# Altium PCB 智能家居-开关-电力板.PcbDoc
Units mm, origin at the board's own origin, x right, y up, seen from the top; angles counter-clockwise.
Board outline 65 x 65 mm, 2 copper layers (Top Layer, Bottom Layer); 16 components, 10 nets, 46 pads, 0 vias.
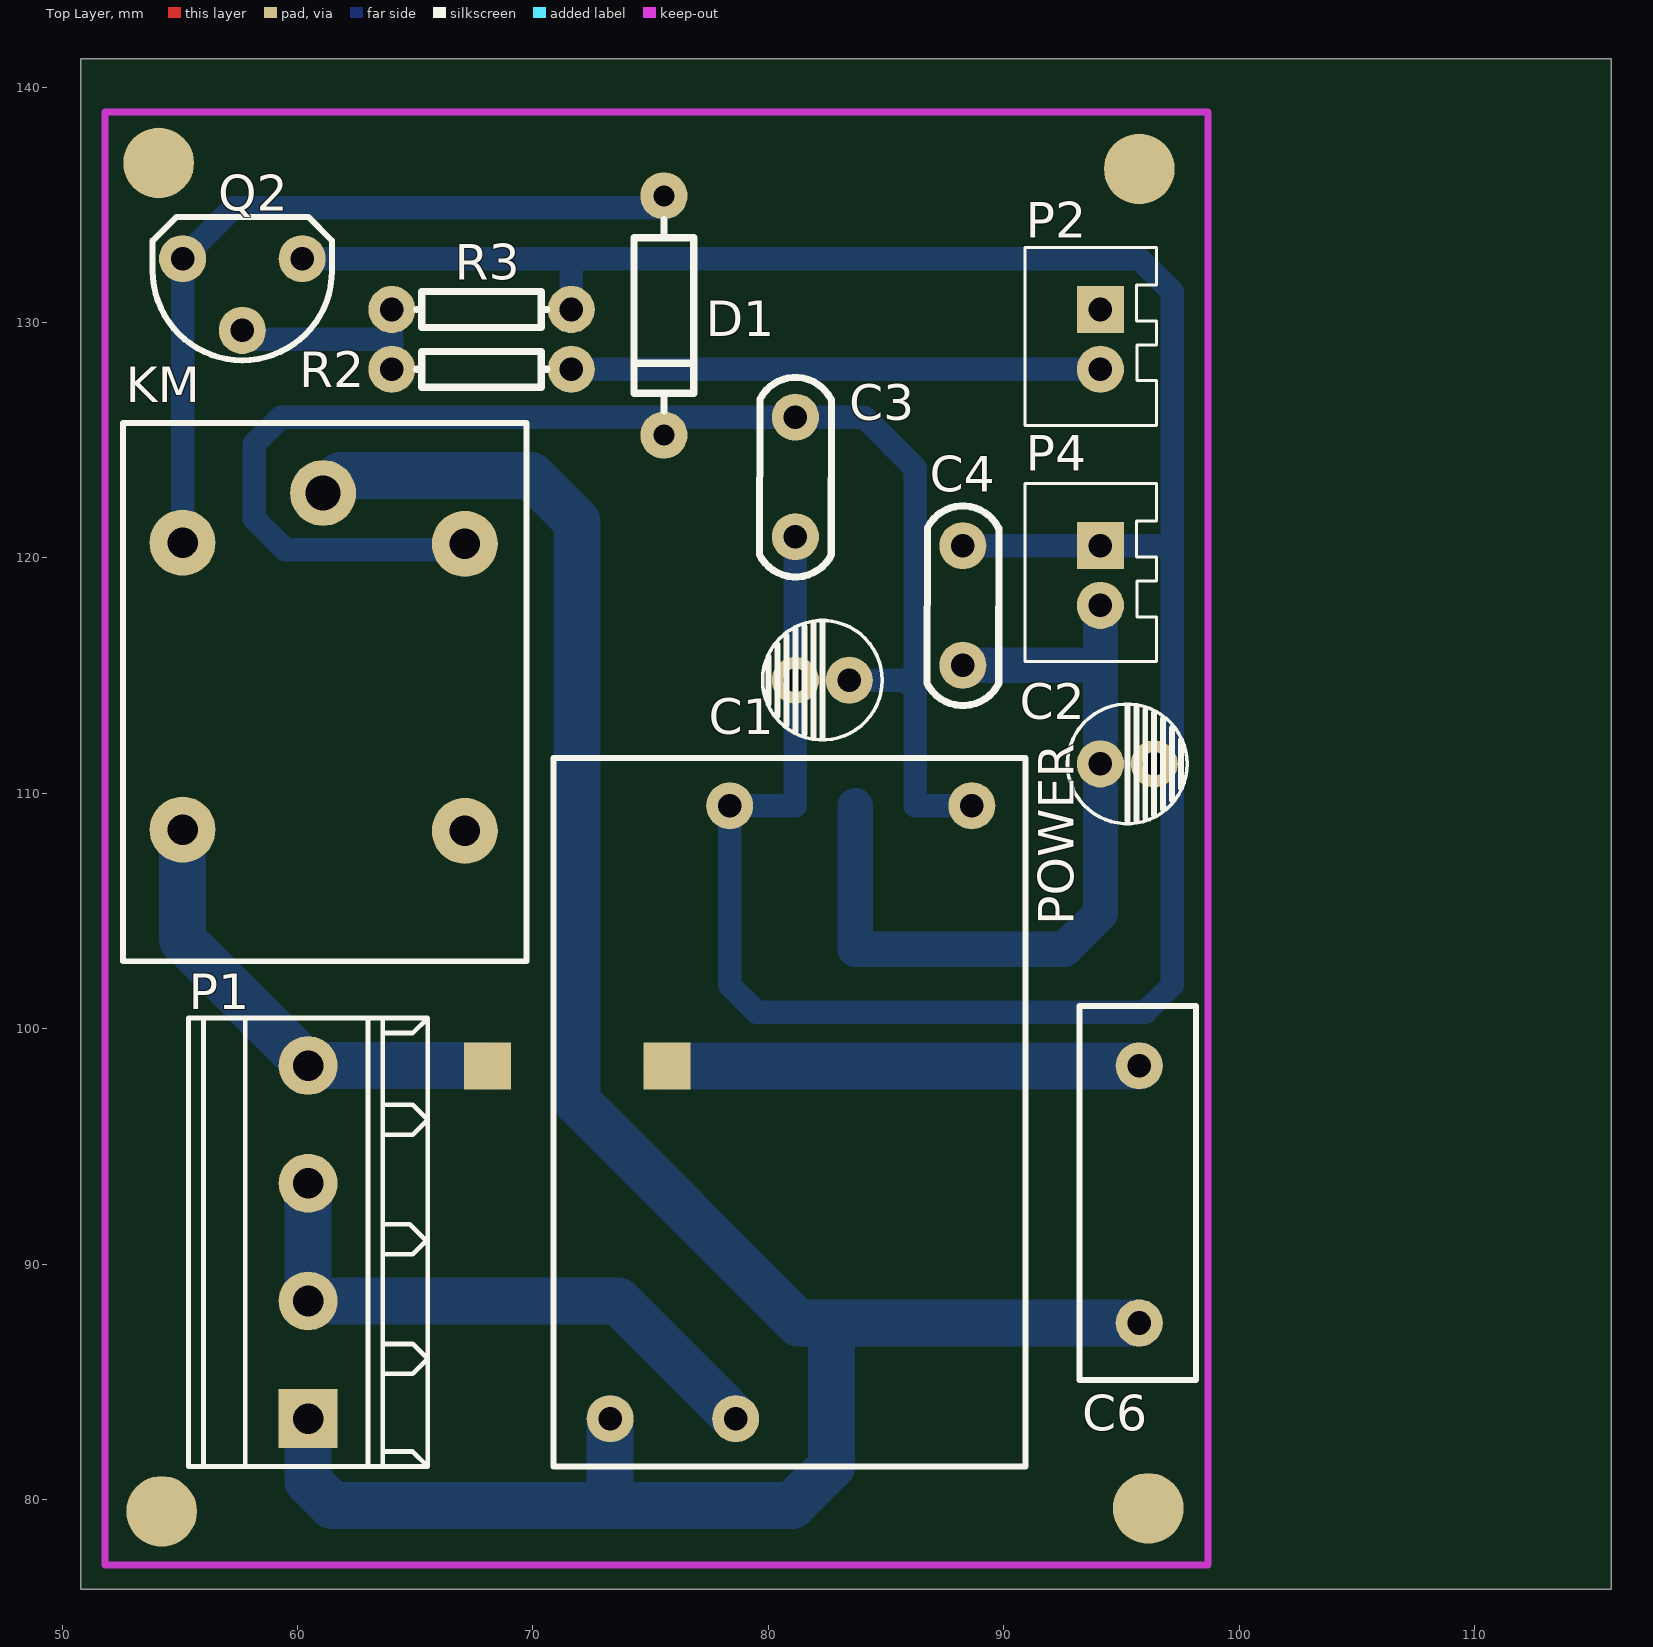
[diagram p0: Top Layer view]
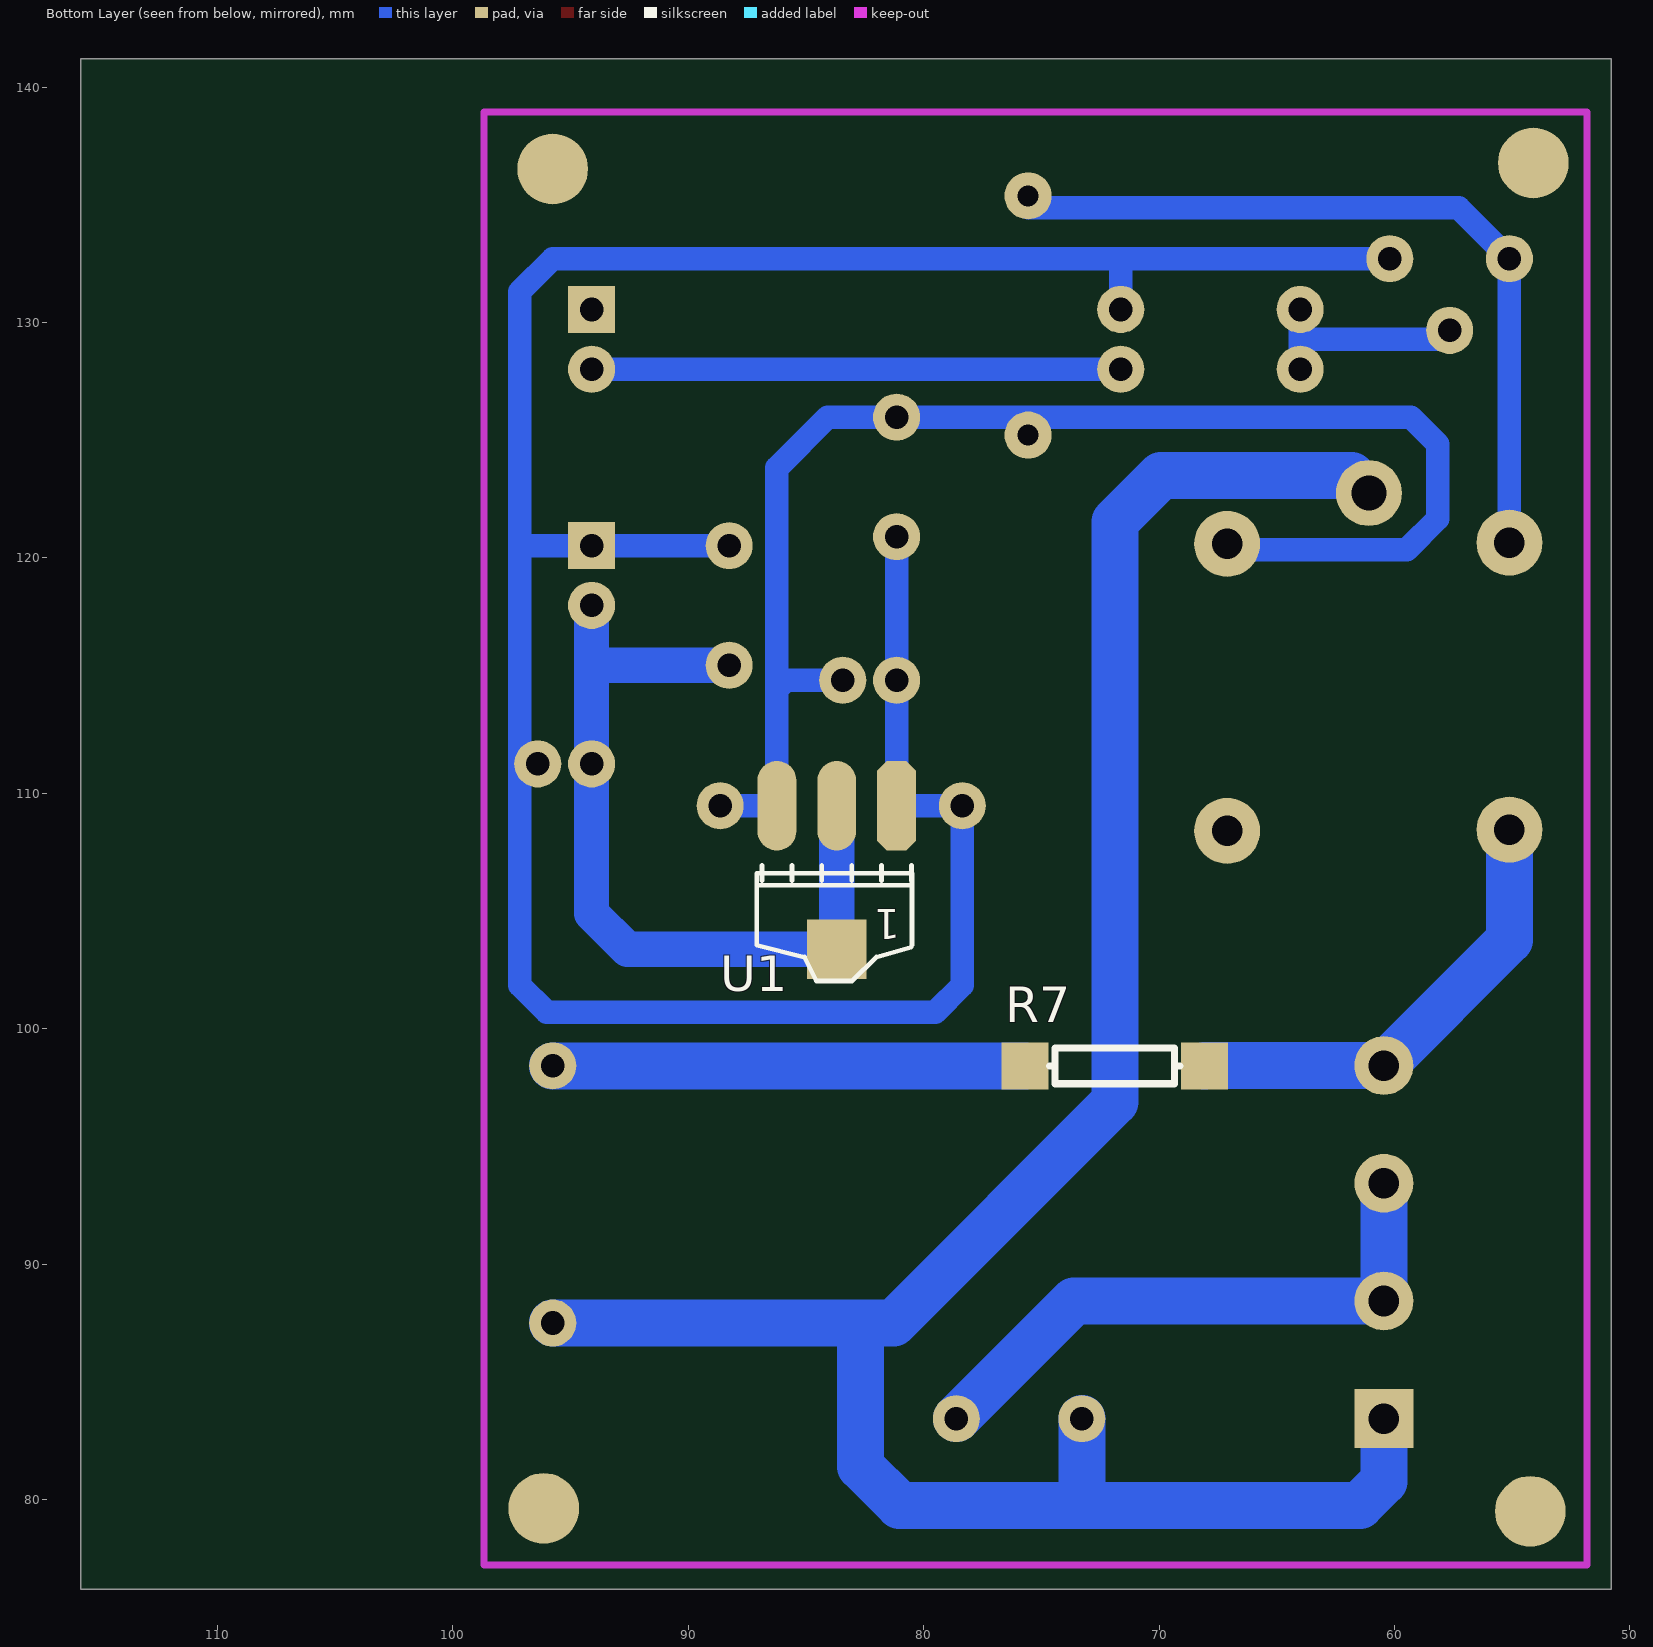
[diagram p1: Bottom Layer view, seen from below]

## Layer stack, top to bottom
Top Solder: solder mask 0.0102, Solder Resist, Dk 3.5
Top Layer: signal copper 0.0356
Dielectric 1: dielectric 0.32, FR-4, Dk 4.8
Bottom Layer: signal copper 0.0356
Bottom Solder: solder mask 0.0102, Solder Resist, Dk 3.5

## Board outline
50.8,76.2 115.8,76.2 115.8,141.2 50.8,141.2

## Design rules (kind name [scope] priority, off if disabled: settings)
Clearance [All] p1: gap=0.5
PolygonConnect [All] p1: connectstyle=Relief reliefconductorwidth=0.254 reliefentries=4 polygonreliefangle="90 Angle" airgapwidth=0.254
RoutingVias [All] p1: holewidth=1 width=2 viastyle="Through Hole" minholewidth=0.711 minwidth=1.27 maxholewidth=0.711 maxwidth=1.27
SolderMaskExpansion [All] p1: expansion=0.102
Width [All] p1: maxlimit=5 minlimit=0.5 preferedwidth=0.5 minimp=50.000000 maximp=50.000000 favimp=50.000000
30 further rules are at their usual default settings.

## Components (designator, comment, footprint, x,y, rotation, side; value= is the part's Value field where it differs from the comment)
C1 "Cap Pol1" CD5 83.439,114.808 r270 top
C2 "Cap Pol1" CD5 94.107,111.252 r90 top
C3 "0.01uF" 0.1UF 81.153,123.444 r270 top
C4 "0.01uF" 0.1UF 88.265,117.983 r270 top
C6 "Cap" 0.1UF/275V 95.758,98.425 r270 top
D1 "Diode" DIODE 75.565,135.382 r270 top
KM "12VDC" SRD_RELAY 61.112,115.583 r270 top
P1 "电源端口" JK128-500-4P 60.452,83.439 r180 top
P2 "双向可控硅控制端口" TJC3-2A 94.107,130.556 r270 top
P4 "控制板电源端口" TJC3-2A 94.107,120.523 r270 top
POWER "220/5开关电源" 220/5开关电源 73.279,83.439 r90 top
Q2 "8050" TO-92D 57.658,132.715 r180 top
R2 "4.7K" AXIAL0.3#1 67.818,128.016 r180 top
R3 "4.7K" AXIAL0.3#1 67.818,130.556 r0 top
R7 "100" AXIAL0.3#2 71.882,98.425 r0 bottom
U1 "AMS1117-3.3" AMS1117 81.152,109.472 r0 bottom

## Footprints (in the part's own frame and the unit in brackets; to place one, negate y for a bottom-side part, rotate by r counter-clockwise, add the part's x,y. Pads: shape width x height; smd on the part's side, far side on the other; paste and mask are expansions set on the pad)
0.1UF [mm]
  round 2 hole 1: 1(-2.54,0) 2(2.54,0)
  silkscreen extent -4.22,-1.52 4.25,1.53
0.1UF/275V [mm]
  round 2 hole 1: 1(0,0) 2(10.922,0)
  silkscreen extent -2.54,-2.54 13.33,2.41
220/5开关电源 [mm]
  round 2 hole 1: 1(0,0) 2(0,-5.334) 3(26.035,-5.08) 4(26.035,-15.367)
  silkscreen extent -2.03,-17.65 28.07,2.41
AMS1117 [mil]
  oct 65x150 smd: 1(0.03,-0.06)
  oval 65x150 smd: 2(100.03,-0.06) 3(200.03,-0.06)
  rect 100x100 smd: 4(100.03,239.94)
  silkscreen extent -26,100 234,293
AXIAL0.3#1 [mm]
  round 2 hole 1: 1(-3.81,0) 2(3.81,0)
  silkscreen extent -2.77,-0.76 2.77,0.76
AXIAL0.3#2 [mm]
  rect 2x2 all layers, no hole: 1(-3.81,0) 2(3.81,0)
  silkscreen extent -2.77,-0.76 2.77,0.76
CD5 [mm]
  round 2 hole 1: 1(0,0) 2(0,-2.286)
  silkscreen extent -2.54,-3.68 2.54,1.4
DIODE [mm]
  round 2 hole 0.9: 1(0,0) 2(10.16,0)
  silkscreen extent 1.02,-1.27 9.14,1.27
JK128-500-4P [mm]
  rect 2.5x2.5 hole 1.3: 1(0,0)
  round 2.5 hole 1.3: 2(0,-5) 3(0,-10) 4(0,-15)
  silkscreen extent -5.08,-17.02 5.08,2.03
SRD_RELAY [mm]
  round 2.8 hole 1.3: 1(-5.017,5.994) 2(7.175,5.994) 3(7.125,-5.994) 4(-5.067,-5.994)
  round 2.8 hole 1.5: 5(-7.175,-0.025)
  silkscreen extent -10.15,-8.53 12.71,8.61
TJC3-2A [mm]
  rect 2x2 hole 1: 1(0,0)
  round 2 hole 1: 2(2.54,0)
  silkscreen extent -2.64,-3.2 4.93,2.39
TO-92D [mm]
  round 2 hole 1: 1(-2.54,0) 2(0,3.048) 3(2.54,0)
  silkscreen extent -3.81,-1.78 3.81,4.32

## Part data
C1 C2: "Polarized Capacitor (Radial)"
C3 C4: library part Cap, "Capacitor"
C6: "Capacitor"
D1: "Default Diode"
KM: library part SRD-12VDC
P1: library part "Header 4", "Header, 4-Pin"
P2 P4: library part "Header 2", "Header, 2-Pin"
Q2: library part NPN, "NPN Bipolar Transistor"
R2 R3 R7: library part Res1, "Resistor"
U1: library part AMS1117

## Free pads (board coordinates)
  round 3 all layers, no hole: 2(54.229,79.502) 3(96.139,79.629) 4(95.758,136.525) 5(54.102,136.779)

## Nets (pads, with @x,y where several pads share a name; then routed paths per layer and width w, separated by ;. In a path a pad name is that pad's centre, name@x,y a point inside that pad or via, vN(x,y) a via of type N, cw(c..) or ccw(c..) an arc to the next point about the centre after c; other vN are vias at no path point)
GND: C1.2 C2.2 C3.2 C4.1 P4.1 POWER.3 Q2.1 R3.2 U1.1 | length 119.7
  Bottom Layer w1: Q2.1 71.628,132.715 ; R3.2 71.628,132.715 ; C3.2 C1.2 U1.1 POWER.3 78.359,101.854 79.502,100.711 96.012,100.711 97.155,101.854 97.155,120.396 ; C4.1 P4.1 97.028,120.523 97.155,120.396 ; 71.628,132.715 95.758,132.715 97.155,131.318 97.155,120.396
L: C6.2 KM.5 P1.1 POWER.1 | length 100.1
  Bottom Layer w2: P1.1 60.452,80.772 61.468,79.756 73.152,79.756 ; KM.5 61.828,123.499 69.922,123.499 71.882,121.539 71.882,96.901 81.28,87.503 82.677,87.503 ; POWER.1 73.279,79.883 73.152,79.756 ; C6.2 82.677,87.503 ; 73.152,79.756 81.026,79.756 82.677,81.407 82.677,87.503
L_OUT: KM.3 P1.4 R7.1 | length 19.9
  Bottom Layer w2: KM.3 55.118,103.773 P1.4 68.058,98.439 R7.1
N: P1.2 P1.3 POWER.2 | length 25.2
  Bottom Layer w2: P1.3 P1.2 73.613,88.439 POWER.2
NetC6_1: C6.1 R7.2 | length 20.1
  Bottom Layer w2: R7.2 C6.1
NetD1_1: D1.1 KM.4 Q2.3 | length 33.3
  Bottom Layer w1: KM.4 55.118,132.334 Q2.3@55.308,132.524 ; Q2.3 57.277,134.874 D1.1@75.565,134.874
NetP2_2: P2.2 R2.1 | length 22.5
  Bottom Layer w1: R2.1 P2.2
NetQ2_2: Q2.2 R2.2 R3.1 | length 8.9
  Bottom Layer w1: Q2.2@57.658,129.286 64.008,129.286 ; R2.2 64.008,129.286 ; R3.1 64.008,129.286
VCC-5: C2.1 C4.2 P4.2 U1.2 U1.4 | length 36.1
  Bottom Layer w1.5: U1.2 U1.4 92.583,103.378 94.107,104.902 C2.1 94.107,115.443 ; C4.2 94.107,115.443 ; P4.2 94.107,115.443
VCC-12: C1.1 C3.1 D1.2 KM.1 POWER.4 U1.3 | length 62
  Bottom Layer w1: KM.1 67.107,120.358 59.474,120.358 58.166,121.666 58.166,124.841 59.309,125.984 C3.1 84.074,125.984 86.233,123.825 86.233,114.681 ; C1.1 85.852,114.808 86.106,114.554 86.233,114.681 ; POWER.4 U1.3 86.233,114.681
pads on no net: KM.2 P2.1

## Keep-outs
Keep-Out Layer:
  lines w0.3: 51.816,77.216 51.816,138.938 98.679,138.938 98.679,77.216 51.816,77.216

## Silkscreen, mask and mechanical layers (free items; w line width, h text height)
Drill Drawing:
  text ".LEGEND" at 120.88,81.28 h1.52
  text "Drill Drawing." at 120.88,78.74 h1.52

## Dimensions
51.816,77.216 to 51.816,138.938 on Mechanical 1
51.816,77.216 to 98.679,77.216 on Mechanical 1

## Text inside footprints (layer, text, board x,y; h text height)
U1: Bottom Overlay "1" at 81.001,105.08 h1.27 r180